# Altium PCB ESC32.PcbDoc
Units mm, origin at the board's own origin, x right, y up, seen from the top; angles counter-clockwise.
Board outline 25.6 x 34 mm, 4 copper layers (Top Layer, Internal Plane 1, Mid-Layer 1, Bottom Layer); 60 components, 54 nets, 210 pads, 0 vias.
Unrouted connection lines stored in the file: 89.
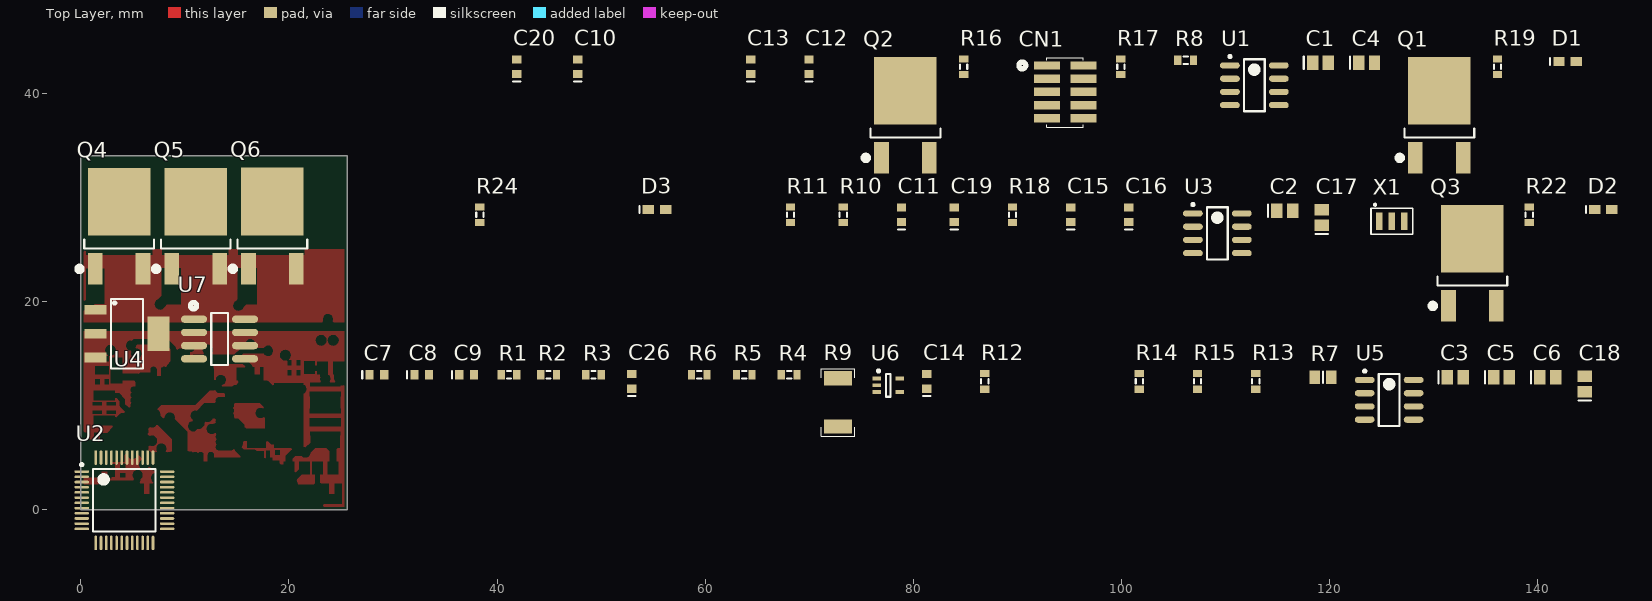
[diagram p0: Top Layer view]
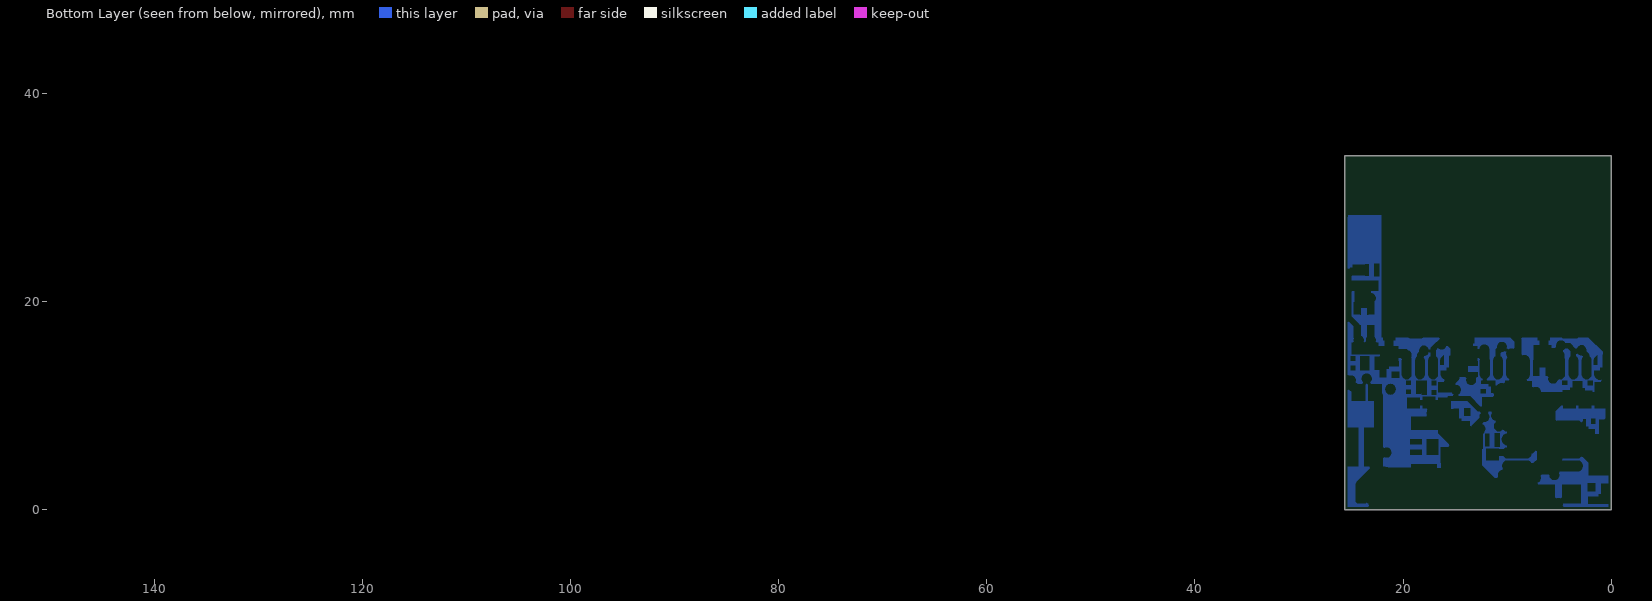
[diagram p1: Bottom Layer view, seen from below]
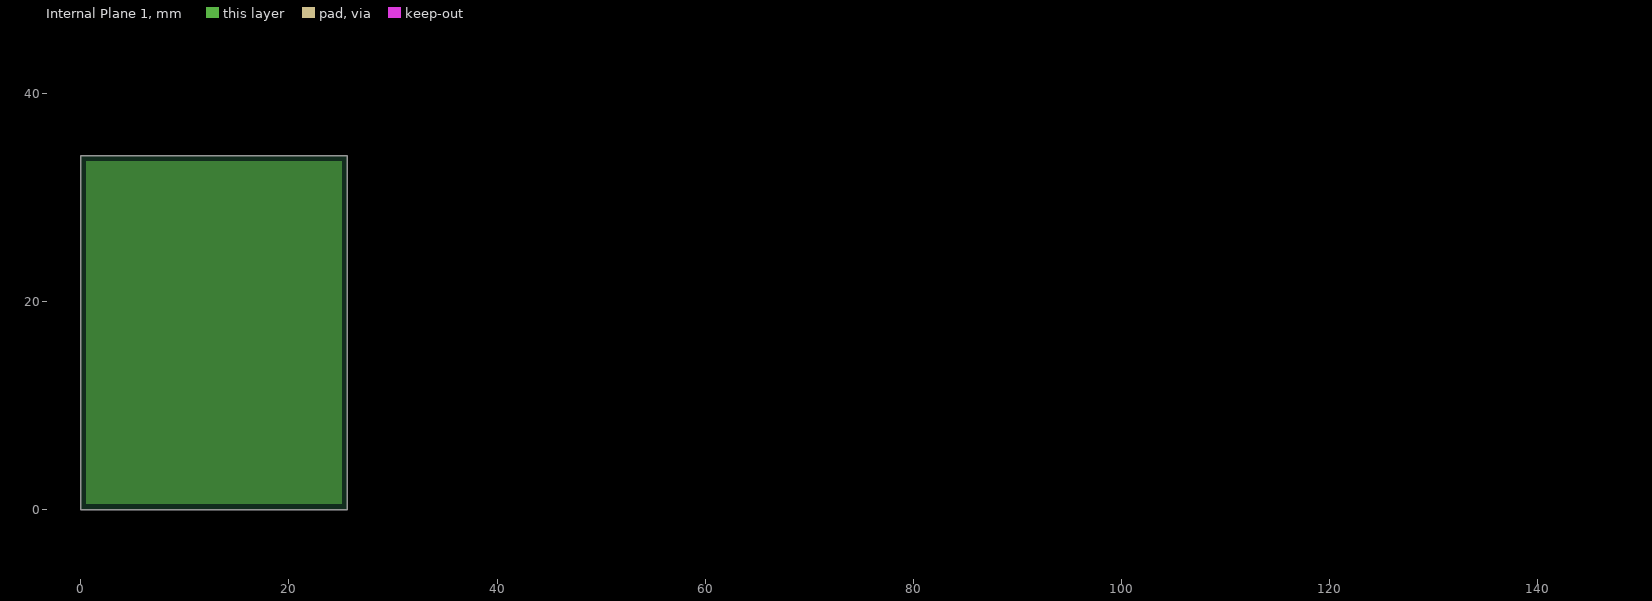
[diagram p2: Internal Plane 1, clearances drawn from the general rule]
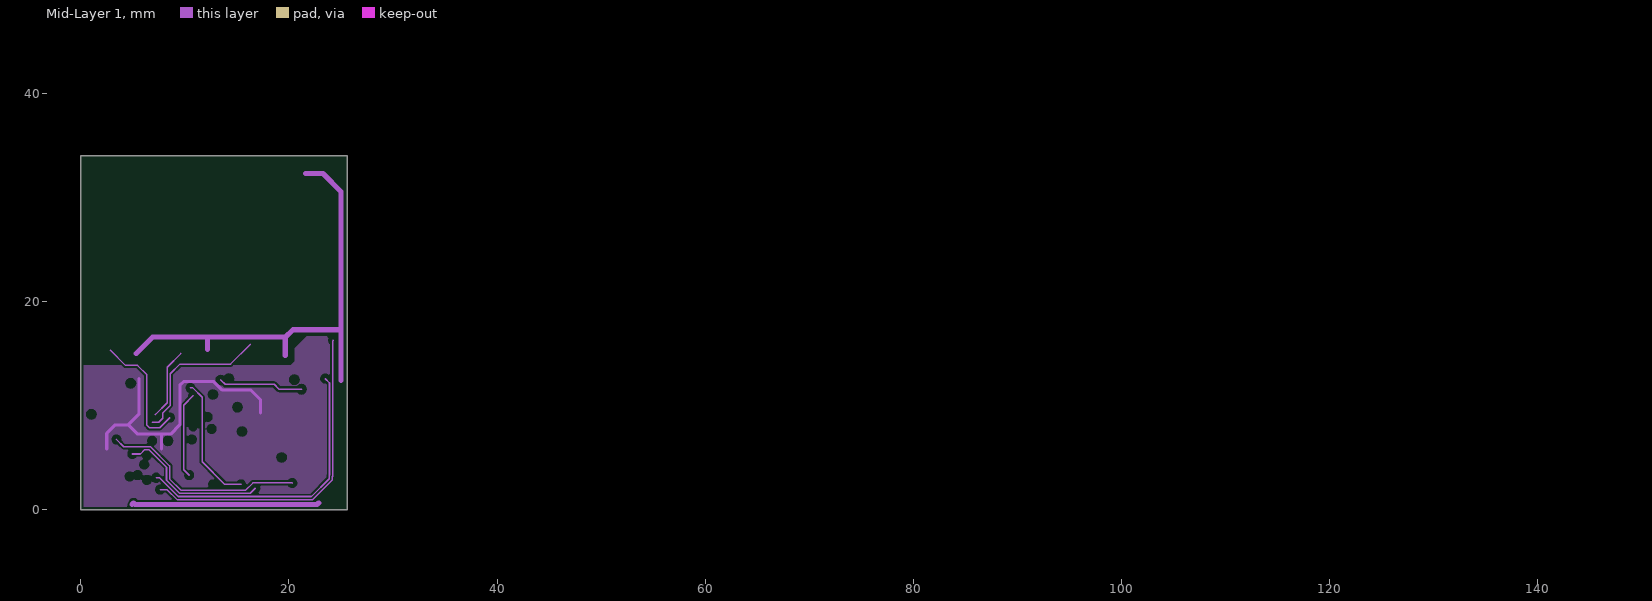
[diagram p3: Mid-Layer 1]

## Layer stack, top to bottom
Top Solder: solder mask 0.0102, Solder Resist, Dk 3.5
Top Layer: signal copper 0.0356
Dielectric1: core 0.32, FR-4, Dk 4.8
Internal Plane 1: plane copper 0.0356
Dielectric3: prepreg 0.32, FR-4, Dk 4.8
Mid-Layer 1: signal copper 0.0356
Dielectric2: core 0.32, FR-4, Dk 4.8
Bottom Layer: signal copper 0.0356
Bottom Solder: solder mask 0.0102, Solder Resist, Dk 3.5

## Board outline
0,0 0,34 25.6,34 25.6,0

## Design rules (kind name [scope] priority, off if disabled: settings)
Clearance Clearance_P [INPolygon] p1: gap=0.127 ignorepadtopadclearanceinfootprint=FALSE
Clearance [All] p2: gap=0.127 ignorepadtopadclearanceinfootprint=FALSE
ComponentClearance [All] p1 off: gap=0.254 collisioncheckmode=3 verticalgap=0.254 showdistances=FALSE
MinimumSolderMaskSliver [All] p1 off: minsoldermaskwidth=0.254
PlaneClearance [All] p1: clearance=0.508
PlaneConnect PlaneConnect_VIA [InNet(GND)] p1: planeconnectstyle=Direct reliefexpansion=0.508 reliefentries=4 reliefconductorwidth=0.254 reliefairgap=0.254
PlaneConnect [All] p2: planeconnectstyle=Relief reliefexpansion=0.508 reliefentries=4 reliefconductorwidth=0.5 reliefairgap=0.5
PolygonConnect PolygonConnect_NET [(InNet('CURRENT_AD') OR InNet('+3.3V')) or isvia] p1: connectstyle=Direct reliefconductorwidth=0.254 reliefentries=4 polygonreliefangle="90 Angle" airgapwidth=0.254
PolygonConnect [All] p2: connectstyle=Relief reliefconductorwidth=0.5 reliefentries=4 polygonreliefangle="90 Angle" airgapwidth=0.254
RoutingVias [All] p1: holewidth=0.3 width=0.6 viastyle="Through Hole" minholewidth=0.3 minwidth=0.6 maxholewidth=0.711 maxwidth=1.27
SilkToSilkClearance [All] p1 off: silktosilkclearance=0.254
SilkToSolderMaskClearance SilkscreenOverComponentPads [IsPad] p1 off: minsilkscreentomaskgap=0.127 clearancetoexposedcopper=TRUE
SolderMaskExpansion [All] p1: expansion=0.102
Width [All] p1: maxlimit=50 minlimit=5 preferedwidth=7
24 further rules are at their usual default settings.

## Components (designator, comment, footprint, x,y, rotation, side; value= is the part's Value field where it differs from the comment)
C1 "C0805-1uF/25V" CAPC2012L 119.126,42.926 r0 top value="1uF,25V, X5R"
C2 "C0805-1uF/25V" CAPC2012L 115.697,28.702 r0 top value="1uF,25V, X5R"
C3 "C0805-1uF/25V" CAPC2012L 132.08,12.7 r0 top value="1uF,25V, X5R"
C4 "C0805-1uF/25V" CAPC2012L 123.571,42.926 r0 top value="1uF,25V, X5R"
C5 "C0805-1uF/25V" CAPC2012L 136.525,12.7 r0 top value="1uF,25V, X5R"
C6 "C0805-1uF/25V" CAPC2012L 140.97,12.7 r0 top value="1uF,25V, X5R"
C7 "C0603-10nF/50V" CAPC1608L 28.448,12.954 r0 top value=10nF,50V
C8 "C0603-10nF/50V" CAPC1608L 32.766,12.954 r0 top value=10nF,50V
C9 "C0603-10nF/50V" CAPC1608L 37.084,12.954 r0 top value=10nF,50V
C10 "C0603-100nF/50V" CAPC1608L 47.752,42.545 r90 top value=100nF,50V
C11 "C0603-100nF/50V" CAPC1608L 78.867,28.321 r90 top value=100nF,50V
C12 "C0603-100nF/50V" CAPC1608L 69.977,42.545 r90 top value=100nF,50V
C13 "C0603-10uF/10V" CAPC1608L 64.389,42.545 r90 top value=10uF,10V
C14 "C0603-1uF/10V" CAPC1608L 81.28,12.319 r90 top value=1uF,10V
C15 "C0603-10uF/10V" CAPC1608L 95.123,28.321 r90 top value=10uF,10V
C16 "C0603-100nF/50V" CAPC1608L 100.711,28.321 r90 top value=100nF,50V
C17 "C0805-1uF/25V" CAPC2012L 119.253,28.067 r90 top value="1uF,25V, X5R"
C18 "C0805-1uF/25V" CAPC2012L 144.526,12.065 r90 top value="1uF,25V, X5R"
C19 "C0603-100nF/50V" CAPC1608L 83.947,28.321 r90 top value=100nF,50V
C20 "C0603-100nF/50V/NC" CAPC1608L 41.91,42.545 r90 top value=100nF,50V/NC
C26 "C0603-10uF/10V" CAPC1608L 52.959,12.319 r90 top value=10uF,10V
CN1 "DPHS1.27SF4S-10P" DPHS1.27SF4S-10P 92.837,42.672 r0 top
D1 "1N4148WT" DIOM1608X06N 142.875,43.053 r0 top
D2 "1N4148WT" DIOM1608X06N 146.304,28.829 r0 top
D3 "1N4148WT" DIOM1608X06N 55.372,28.829 r0 top
Q1 "IRLR7843PbF" TO230P990X239-3N 130.556,37.846 r90 top
Q2 "IRLR7843PbF" TO230P990X239-3N 79.248,37.846 r90 top
Q3 "IRLR7843PbF" TO230P990X239-3N 133.731,23.622 r90 top
Q4 "IRLR7843PbF" TO230P990X239-3N 3.683,27.178 r90 top
Q5 "IRLR7843PbF" TO230P990X239-3N 11.049,27.178 r90 top
Q6 "IRLR7843PbF" TO230P990X239-3N 18.415,27.191 r90 top
R1 "R0603-2.2K" RESC1608L 41.148,12.954 r0 top value=2.2K,1%
R2 "R0603-2.2K" RESC1608L 44.958,12.954 r0 top value=2.2K,1%
R3 "R0603-2.2K" RESC1608L 49.276,12.954 r0 top value=2.2K,1%
R4 "R0603-15K" RESC1608L 68.072,12.954 r0 top value=15K,1%
R5 "R0603-15K" RESC1608L 63.754,12.954 r0 top value=15K,1%
R6 "R0603-15K" RESC1608L 59.436,12.954 r0 top value=15K,1%
R7 "R0805-56.2R" RESC2012L 119.38,12.7 r0 top value=56.2R,1%
R8 "R0603-100K" RESC1608L 106.172,43.18 r0 top value=100K,1%
R9 "R2010-0.5mR1%" RC2010-5025X07N 72.771,10.287 r90 top
R10 "R0603-4.7K" RESC1608L 73.279,28.321 r90 top value=4.7K,1%
R11 "R0603-4.7K" RESC1608L 68.199,28.321 r90 top value=4.7K,1%
R12 "R0603-1.5K" RESC1608L 86.868,12.319 r90 top value=1.5K,1%
R13 "R0603-10K" RESC1608L 112.903,12.319 r90 top value=10K,1%
R14 "R0603-4.99k" RESC1608L 101.727,12.319 r90 top value=4.99k,1%
R15 "R0603-100R" RESC1608L 107.315,12.319 r90 top value=100R,1%
R16 "R0603-240R" RESC1608L 84.836,42.545 r90 top value=240R,1%
R17 "R0603-240R" RESC1608L 99.949,42.545 r90 top value=240R,1%
R18 "R0603-4.7K" RESC1608L 89.535,28.321 r90 top value=4.7K,1%
R19 "R0603-30R" RESC1608L 136.144,42.545 r90 top value=30R,1%
R22 "R0603-30R" RESC1608L 139.192,28.321 r90 top value=30R,1%
R24 "R0603-30R" RESC1608L 38.354,28.321 r90 top value=30R,1%
U1 "IR2301S" SOIC127P600X175-8L 112.776,40.767 r0 top
U2 "STM32F103C8T7" TSQFP50P900X900X160-48L 4.191,0.889 r0 top
U3 "IR2301S" SOIC127P600X175-8L 109.22,26.543 r0 top
U4 "LM2937IMP-3.3" SOT230P700X180-4N 4.445,16.891 r0 top
U5 "IR2301S" SOIC127P600X175-8L 125.73,10.541 r0 top
U6 "LMV321IDCK" SOT65P210X110-5L(SC70) 77.597,11.938 r0 top
U7 "SN65HVD234D/NC" SOIC127P600X175-8M 13.335,16.383 r0 top
X1 "CSTCE8M00G55-R0" CSTCE_G 125.984,27.686 r0 top

## Footprints (in the part's own frame and the unit in brackets; to place one, negate y for a bottom-side part, rotate by r counter-clockwise, add the part's x,y. Pads: shape width x height; smd on the part's side, far side on the other; paste and mask are expansions set on the pad)
CAPC1608L [mm]
  rect 0.8x0.9 smd: 1(-0.7,0) 2(0.7,0)
  silkscreen extent -1.4,-0.35 -1.4,0.35, body extent -0.87,-0.48 0.87,0.48, height 0.85
CAPC2012L [mm]
  rect 1.1x1.4 smd: 1(-0.75,0) 2(0.75,0)
  silkscreen extent -1.6,-0.6 -1.6,0.6, body extent -1.1,-0.72 1.1,0.72, height 1.1
CSTCE_G [mm]
  rect 0.6x1.7 smd: 1(-1.2,0) 2(0,0) 3(1.2,0)
  silkscreen extent -2,-1.25 2,1.7, body extent -1.6,-0.65 1.6,0.65, height 0.7
DIOM1608X06N [mm]
  rect 1.1x0.85 smd: 1(0.825,0) 2(-0.825,0)
  silkscreen extent -1.68,-0.33 -1.68,0.33, body extent -0.85,-0.45 0.85,0.45, height 0.65
DPHS1.27SF4S-10P [mm]
  rect 2.5x0.8 smd: 1(0,0) 2(3.5,0) 3(0,-1.27) 4(3.5,-1.27) 5(0,-2.54) 6(3.5,-2.54) 7(0,-3.81) 8(3.5,-3.81) 9(0,-5.08) 10(3.5,-5.08)
  silkscreen extent -2.68,-5.95 3.5,0.75
RC2010-5025X07N [mm]
  rect 1.35x2.7 smd: 1(-2.325,0) 2(2.325,0)
  silkscreen extent -3.25,-1.6 3.25,1.6, body extent -2.57,-1.33 2.58,1.32, height 0.7
RESC1608L [mm]
  rect 0.7x0.9 smd: 1(-0.75,0) 2(0.75,0)
  silkscreen extent -0.2,-0.35 0.2,0.35, body extent -0.85,-0.48 0.85,0.48, height 0.6
RESC2012L [mm]
  rect 1x1.3 smd: 1(-0.8,0) 2(0.8,0)
  silkscreen extent 0,-0.55 0,0.55, body extent -1.07,-0.7 1.07,0.7, height 0.65
SOIC127P600X175-8L [mm]
  oval 1.9x0.6 smd: 1(-2.35,1.905) 2(-2.35,0.635) 3(-2.35,-0.635) 4(-2.35,-1.905) 5(2.35,-1.905) 6(2.35,-0.635) 7(2.35,0.635) 8(2.35,1.905)
  silkscreen extent -2.47,-2.5 1,2.88, body extent -2,-2.5 2,2.5, height 1.75
SOIC127P600X175-8M [mm]
  oval 2.5x0.7 smd: 1(-2.45,1.905) 2(-2.45,0.635) 3(-2.45,-0.635) 4(-2.45,-1.905) 5(2.45,-1.905) 6(2.45,-0.635) 7(2.45,0.635) 8(2.45,1.905)
  silkscreen extent -2.8,-2.5 0.8,3.5, body extent -2,-2.5 2,2.5, height 1.75
SOT65P210X110-5L(SC70) [mm]
  rect 0.85x0.35 smd: 1(-1.1,0.65) 2(-1.1,0) 3(-1.1,-0.65) 4(1.1,-0.65) 5(1.1,0.65)
  silkscreen extent -1.05,-1.1 0.2,1.5, body extent -0.7,-1.07 0.7,1.08, height 1.1
SOT230P700X180-4N [mm]
  rect 2.15x0.95 smd: 1(-3.025,2.3) 2(-3.025,0) 3(-3.025,-2.3)
  rect 2.15x3.3 smd: 4(3.025,0)
  silkscreen extent -1.55,-3.35 1.55,3.35, body extent -1.85,-3.35 1.85,3.35, height 1.8
TO230P990X239-3N [mm]
  rect 3.05x1.4 smd: 1(-4.05,2.3) 3(-4.05,-2.3)
  rect 6.5x6 smd: 4(2.4,0)
  silkscreen extent -4.31,-3.35 -1.25,4.06, body extent -2.1,-3.37 4.12,3.37, height 2.39
TSQFP50P900X900X160-48L [mm]
  oval 1.4x0.25 smd: 1(-4.1,2.75) 2(-4.1,2.25) 3(-4.1,1.75) 4(-4.1,1.25) 5(-4.1,0.75) 6(-4.1,0.25) 7(-4.1,-0.25) 8(-4.1,-0.75) 9(-4.1,-1.25) 10(-4.1,-1.75) 11(-4.1,-2.25) 12(-4.1,-2.75) 25(4.1,-2.75) 26(4.1,-2.25) 27(4.1,-1.75) 28(4.1,-1.25) 29(4.1,-0.75) 30(4.1,-0.25) 31(4.1,0.25) 32(4.1,0.75) 33(4.1,1.25) 34(4.1,1.75) 35(4.1,2.25) 36(4.1,2.75)
  oval 0.25x1.4 smd: 13(-2.75,-4.1) 14(-2.25,-4.1) 15(-1.75,-4.1) 16(-1.25,-4.1) 17(-0.75,-4.1) 18(-0.25,-4.1) 19(0.25,-4.1) 20(0.75,-4.1) 21(1.25,-4.1) 22(1.75,-4.1) 23(2.25,-4.1) 24(2.75,-4.1) 37(2.75,4.1) 38(2.25,4.1) 39(1.75,4.1) 40(1.25,4.1) 41(0.75,4.1) 42(0.25,4.1) 43(-0.25,4.1) 44(-0.75,4.1) 45(-1.25,4.1) 46(-1.75,4.1) 47(-2.25,4.1) 48(-2.75,4.1)
  silkscreen extent -4.22,-3 3,3.55, body extent -3.5,-3.5 3.5,3.5, height 1.6

## Part data
C1 C2 C3 C4 C5 C6 C17 C18: "X5R,20%", Mfr P/N=C2012X5R1E105K
C7 C8 C9 C20 C26: library part C0603-100nF/50V, "X7R"
C10 C11 C12 C16 C19: "X7R"
C13 C14 C15: "X5R,20%"
CN1: library part DPHS1, "1.27 间距表贴双排针, 40芯, PCB板高度为4.3mm"
D1 D2 D3: "SURFACE MOUNT FAST SWITCHING DIODE", Mfr=DIODES, TOPMARK=T4
R1 R2 R3: "2.2K,1%", Tolerance=1%
R4 R5 R6: library part R0603-10K, "10K,1%", Tolerance=1%
R7: "56.2R,1%", Tolerance=-
R8: "100K,1%", Tolerance=1%
R9: library part R, "Vishay WSL功率型电阻", 制?=Vishay, 功?=1/2W, 器?=-
R10 R11 R18: "4.7K,1%", Tolerance=1%
R12: library part R0603-15K, "15K,1%", Tolerance=1%
R13: library part R0603-100K, "100K,1%", Tolerance=1%
R14: library part R0603-49.9K, "4.99k,1%", Tolerance=1%
R15: "100R,1%", Tolerance=1%
R16 R17: "240R,1%", Tolerance=1%
R19 R22 R24: library part R0603-22R, "22R,1%", Tolerance=1%
U7: library part SN65HVD234D, "3.3-V CAN TRANSCEIVERS"

## Nets (pads, with @x,y where several pads share a name; then routed paths per layer and width w, separated by ;. In a path a pad name is that pad's centre, name@x,y a point inside that pad or via, vN(x,y) a via of type N, cw(c..) or ccw(c..) an arc to the next point about the centre after c; other vN are vias at no path point)
+3.3V: C6.1 C10.1 C11.1 C12.1 C13.1 C14.1 C15.1 C16.1 C20.1 CN1.1 R10.2 R11.2 R16.2 R17.2 R18.2 U2.1 U2.9 U2.24 U2.36 U2.48 U4.3 U6.5 U7.3 | length 29.5
  Mid-Layer 1 w0.3: 2.493,5.831 2.493,7.319 3.302,8.128 4.572,8.128 ; 5.588,12.573 5.588,9.144 4.572,8.128 ; 7.747,5.842 7.747,7.239 ; 17.272,9.271 17.272,10.541 16.313,11.5 14.929,11.5 13.559,11.5 12.775,12.284 9.871,12.284 9.525,11.938 9.525,8.128 8.636,7.239 7.747,7.239 ; 4.572,8.128 5.461,7.239 7.747,7.239
+5V:  | length 18.1
  Mid-Layer 1 w0.5: 4.92,0.475 5.08,0.635 5.24,0.475 11.811,0.475 22.7,0.475 22.86,0.635
+VS: C4.1 C17.1 C18.1 D1.1 D2.1 D3.1 Q1.4 Q3.4 Q5.4 R7.2 R13.2 U1.1 U3.1 U5.1 | length 45.8
  Mid-Layer 1 w0.5: 5.334,14.986 6.923,16.575 12.192,16.575 ; 12.192,15.367 12.192,16.575 ; 19.655,14.829 19.655,16.545 19.685,16.575 ; 21.625,32.275 23.275,32.275 25.018,30.532 25.018,17.272 ; 25.018,12.407 25.018,17.272 ; 12.192,16.575 19.685,16.575 ; 19.685,16.575 20.382,17.272 25.018,17.272
BOOT0: R8.1 U2.44
CAN_RX: U2.33 U7.4
CAN_TX: U2.32 U7.1
CURRENT_AD: Q2.3 Q4.3 Q6.3 R9.2 U6.1
E_LED: U2.40 | length 12.3
  Mid-Layer 1 w0.15: 10.541,11.684 10.775,11.684 11.667,10.792 11.667,4.589 13.843,2.413 15.401,2.413
FET_A_H: U1.2 U2.42
FET_A_L: U1.3 U2.17 | length 14.6
  Mid-Layer 1 w0.15: 6.858,8.382 7.493,8.382 7.871,8.76 7.871,9.271 8.601,10.001 8.601,13.046 9.525,13.97 14.395,13.97 16.3,15.875
FET_B_H: U2.43 U3.2
FET_B_L: U2.18 U3.3 | length 6.9
  Mid-Layer 1 w0.15: 7.174,9.127 8.301,10.254 8.301,13.676 9.625,15
FET_C_H: U2.45 U5.2
FET_C_L: U2.19 U5.3 | length 12
  Mid-Layer 1 w0.15: 2.85,15.3 4.307,13.843 5.461,13.843 6.333,12.971 6.333,8.128 6.604,7.857 7.583,7.857 8.553,8.827
GND: C4.2 C5.2 C6.2 C7.2 C8.2 C9.2 C10.2 C11.2 C12.2 C13.2 C14.2 C15.2 C16.2 C17.2 C18.2 C19.2 C20.2 C26.2 CN1.3 CN1.5 CN1.9 R1.1 R2.1 R3.1 R8.2 R9.1 R12.1 R15.1 U1.4 U2.8 U2.20 U2.23 U2.35 U2.47 U3.4 U4.2 U4.4 U5.4 U6.2 U7.2 X1.2
H: U7.7 | length 19.9
  Mid-Layer 1 w0.15: 3.429,6.731 4.128,6.032 6.692,6.032 8.535,4.188 8.535,2.938 9.623,1.85 15.84,1.85 16.547,2.557 20.303,2.557 20.32,2.54
IIC_CLK: R11.1 U2.21
IIC_DATA: R10.1 U2.22
JTMS/SWDIO: CN1.2 U2.34
L: U7.6 | length 14.6
  Mid-Layer 1 w0.15: 4.953,5.334 5.735,5.334 6.133,5.732 6.567,5.732 8.235,4.064 8.235,2.814 9.499,1.55 16.282,1.55 16.764,2.032
MOTOR_A: C1.2 Q1.3 Q2.4 R4.2 U1.6
MOTOR_B: C2.2 Q3.3 Q4.4 R5.2 U3.6
MOTOR_C: C3.2 Q5.3 Q6.4 R6.2 U5.6
NetC1_1: C1.1 D1.2 U1.8
NetC2_1: C2.1 D2.2 U3.8
NetC3_1: C3.1 D3.2 U5.8
NetLED1_1: R17.1
NetLED2_1: R16.1
NetQ1_1: Q1.1 R19.2
NetQ2_1: Q2.1 U1.5
NetQ3_1: Q3.1 R22.2
NetQ4_1: Q4.1 U3.5
NetQ5_1: Q5.1 R24.2
NetQ6_1: Q6.1 U5.5
NetR7_1: R7.1
NetR14_1: R14.1 R15.2 U6.3
NetR19_1: R19.1 U1.7
NetR22_1: R22.1 U3.7
NetR24_1: R24.1 U5.7
NetU2_5: U2.5 X1.1
NetU2_6: U2.6 X1.3
NRST: C19.1 CN1.10 R18.1 U2.7 | length 8.1
  Mid-Layer 1 w0.15: 13.462,12.446 13.883,12.025 18.582,12.025 19.05,11.557 21.209,11.557
PWM_IN?: U2.29
S_LED: U2.39 | length 8.2
  Mid-Layer 1 w0.15: 10.414,3.302 9.9,3.816 9.9,10.027 10.795,10.922
SENSE_A: C9.1 R3.2 R4.1 U2.11
SENSE_B: C8.1 R2.2 R5.1 U2.12
SENSE_C: C7.1 R1.2 R6.1 U2.13
SENSE_CURRENT: C26.1 R14.2 U2.15 U6.4 | length 31.2
  Mid-Layer 1 w0.15: 7.62,1.905 8.295,1.905 9.25,0.95 22.286,0.95 24.175,2.839 24.175,3.142 24.2,3.167 24.2,16.199 24.257,16.256
SENSE_VIN: R12.2 R13.1 U2.14 | length 27.9
  Mid-Layer 1 w0.15: 7.239,3.048 7.577,3.048 9.375,1.25 22.162,1.25 23.875,2.963 23.875,3.292 23.9,3.317 23.9,12.168 23.495,12.573
TCK/SWCLK: CN1.4 U2.37
U_LED: U2.28
UART_RX: U2.31
UART_TX: U2.30
VIN: C5.1 U4.1
pads on no net: CN1.6 CN1.7 CN1.8 U2.2 U2.3 U2.4 U2.10 U2.16 U2.25 U2.26 U2.27 U2.38 U2.41 U2.46 U7.5 U7.8

## Polygon pours and split planes (outlines as drawn)
CURRENT_AD on Top Layer "g" (solid, remove dead copper, pour order 2): 25.6,19.5 25.6,18 0,18 0,24.5 0.5,25 25.6,25
GND on Top Layer "Top Layer-No Net" (solid, remove dead copper, pour order 9): 25.6,17.145 0,17.145 0,0 25.527,0 25.654,0
+3.3V on Mid-Layer 1 "Top Layer-No Net" (solid, remove dead copper, pour order 7): 25.6,0 25.6,10.16 24.13,11.63 24.13,13.081 24.13,16.129 23.622,16.637 21.717,16.637 21.59,16.51 20.574,15.494 20.574,14.224 20.193,13.843 19.05,13.843 0,13.843 0,0
GND on Bottom Layer "Top Layer-No Net" (solid, remove dead copper, pour order 11): 22.86,34 25.527,34 25.527,0 0.127,0 0,0 0,16.51 22.098,16.51 22.098,34
GND on Internal Plane 1 (split plane): 25.09,0.51 0.51,0.51 0.51,33.49 25.09,33.49